# Altium PCB daughterboard.PcbDoc
Units mil, origin at the board's own origin, x right, y up, seen from the top; angles counter-clockwise.
Board outline 6000 x 4000 mil, 4 copper layers (Top Layer, Mid-Layer 1, Mid-Layer 2, Bottom Layer); 64 components, 93 nets, 397 pads, 0 vias.
Unrouted connection lines stored in the file: 194.
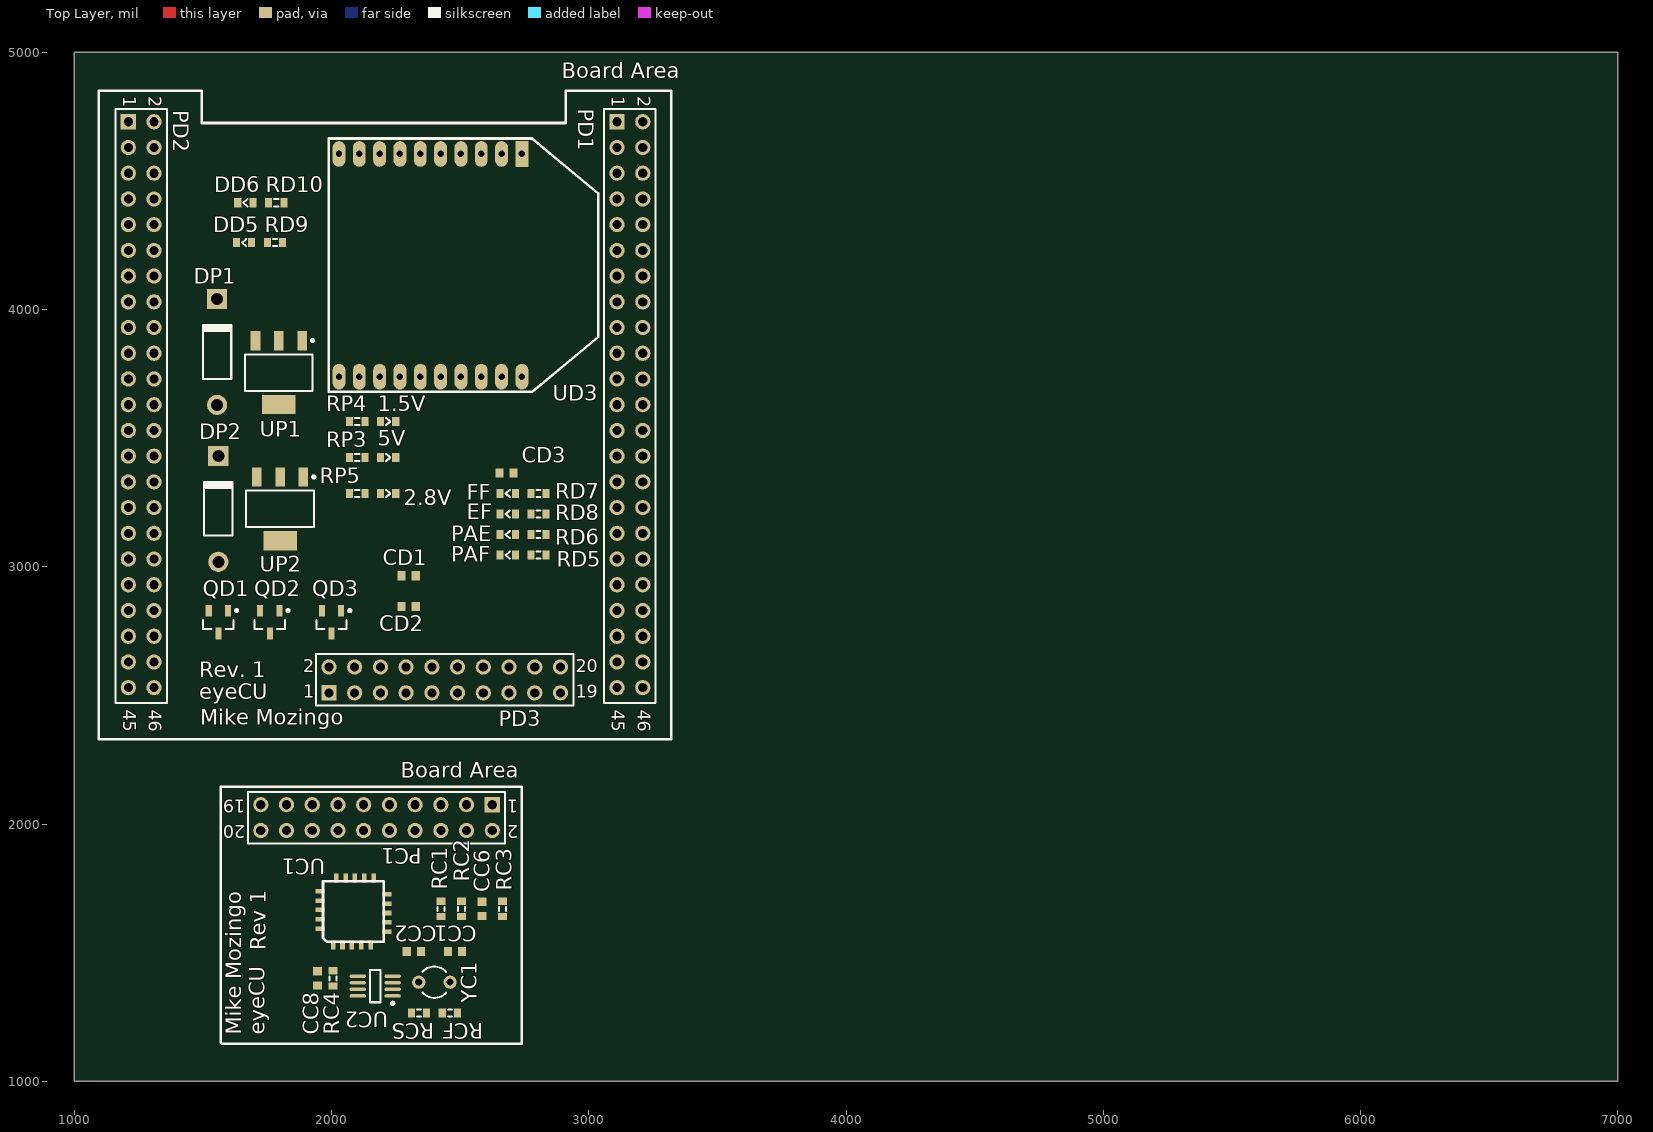
[diagram p0: Top Layer view]
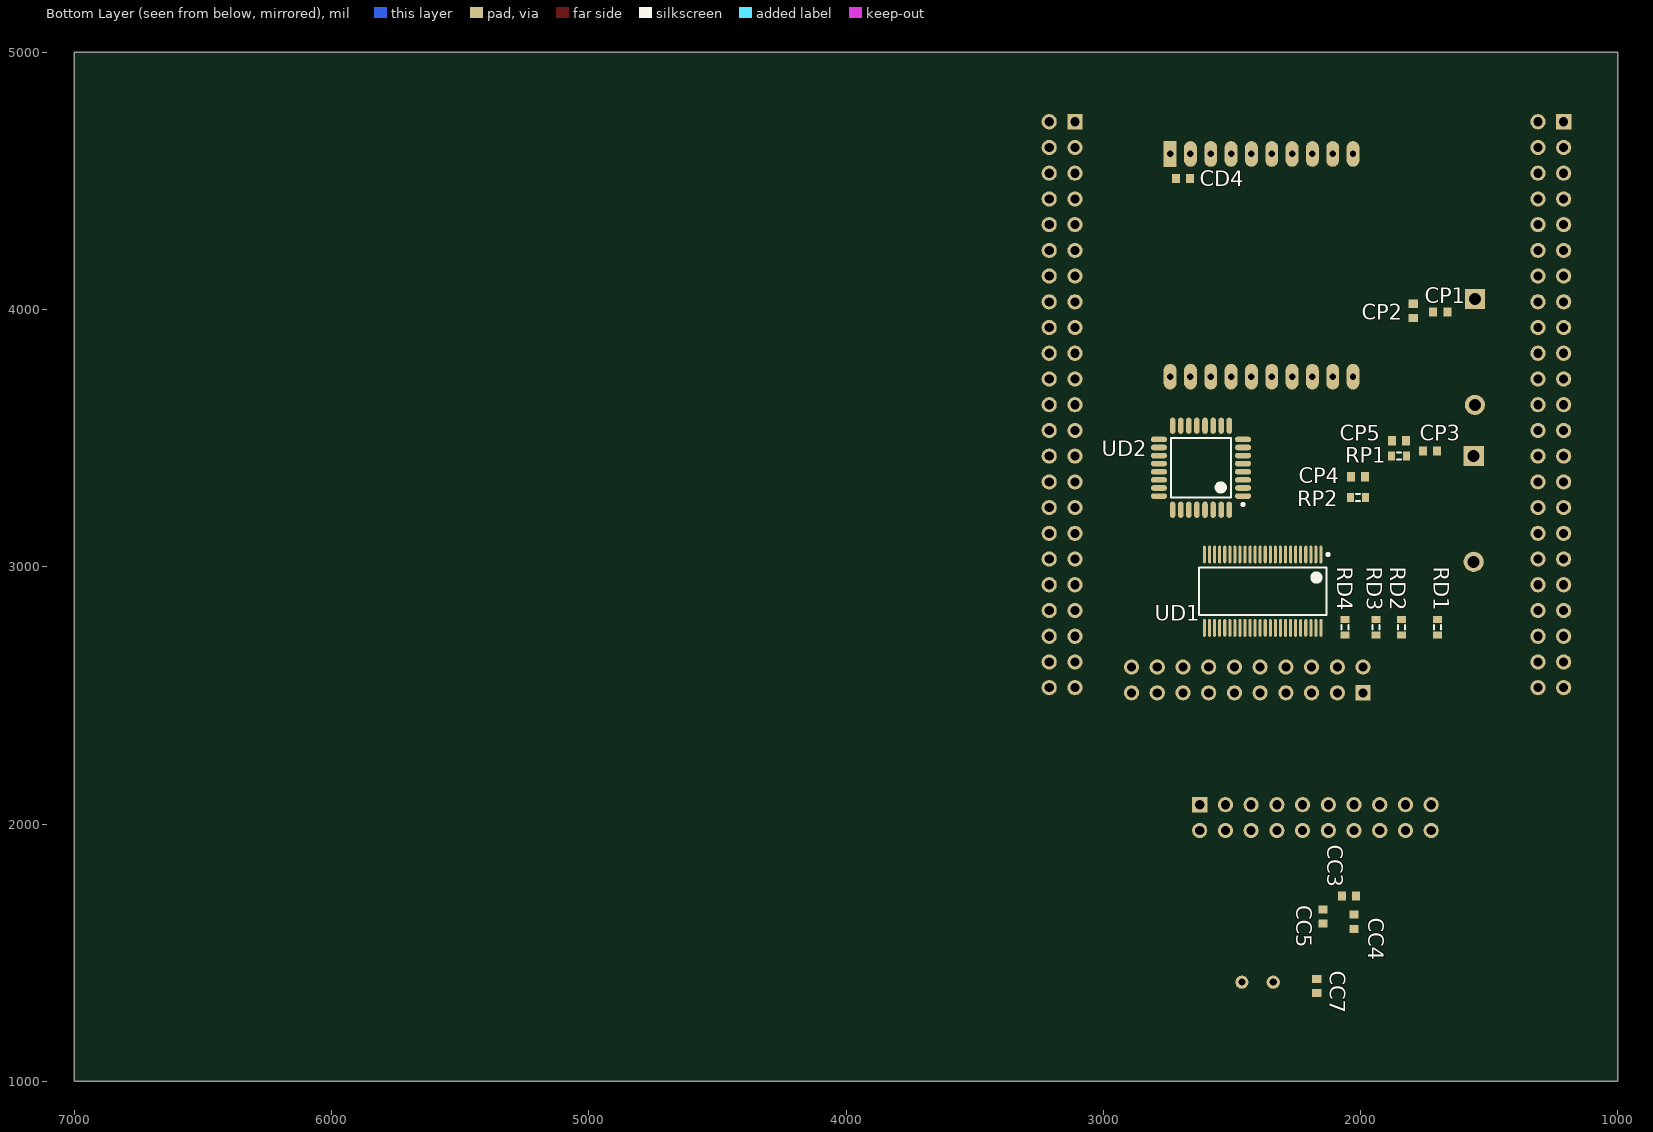
[diagram p1: Bottom Layer view, seen from below]
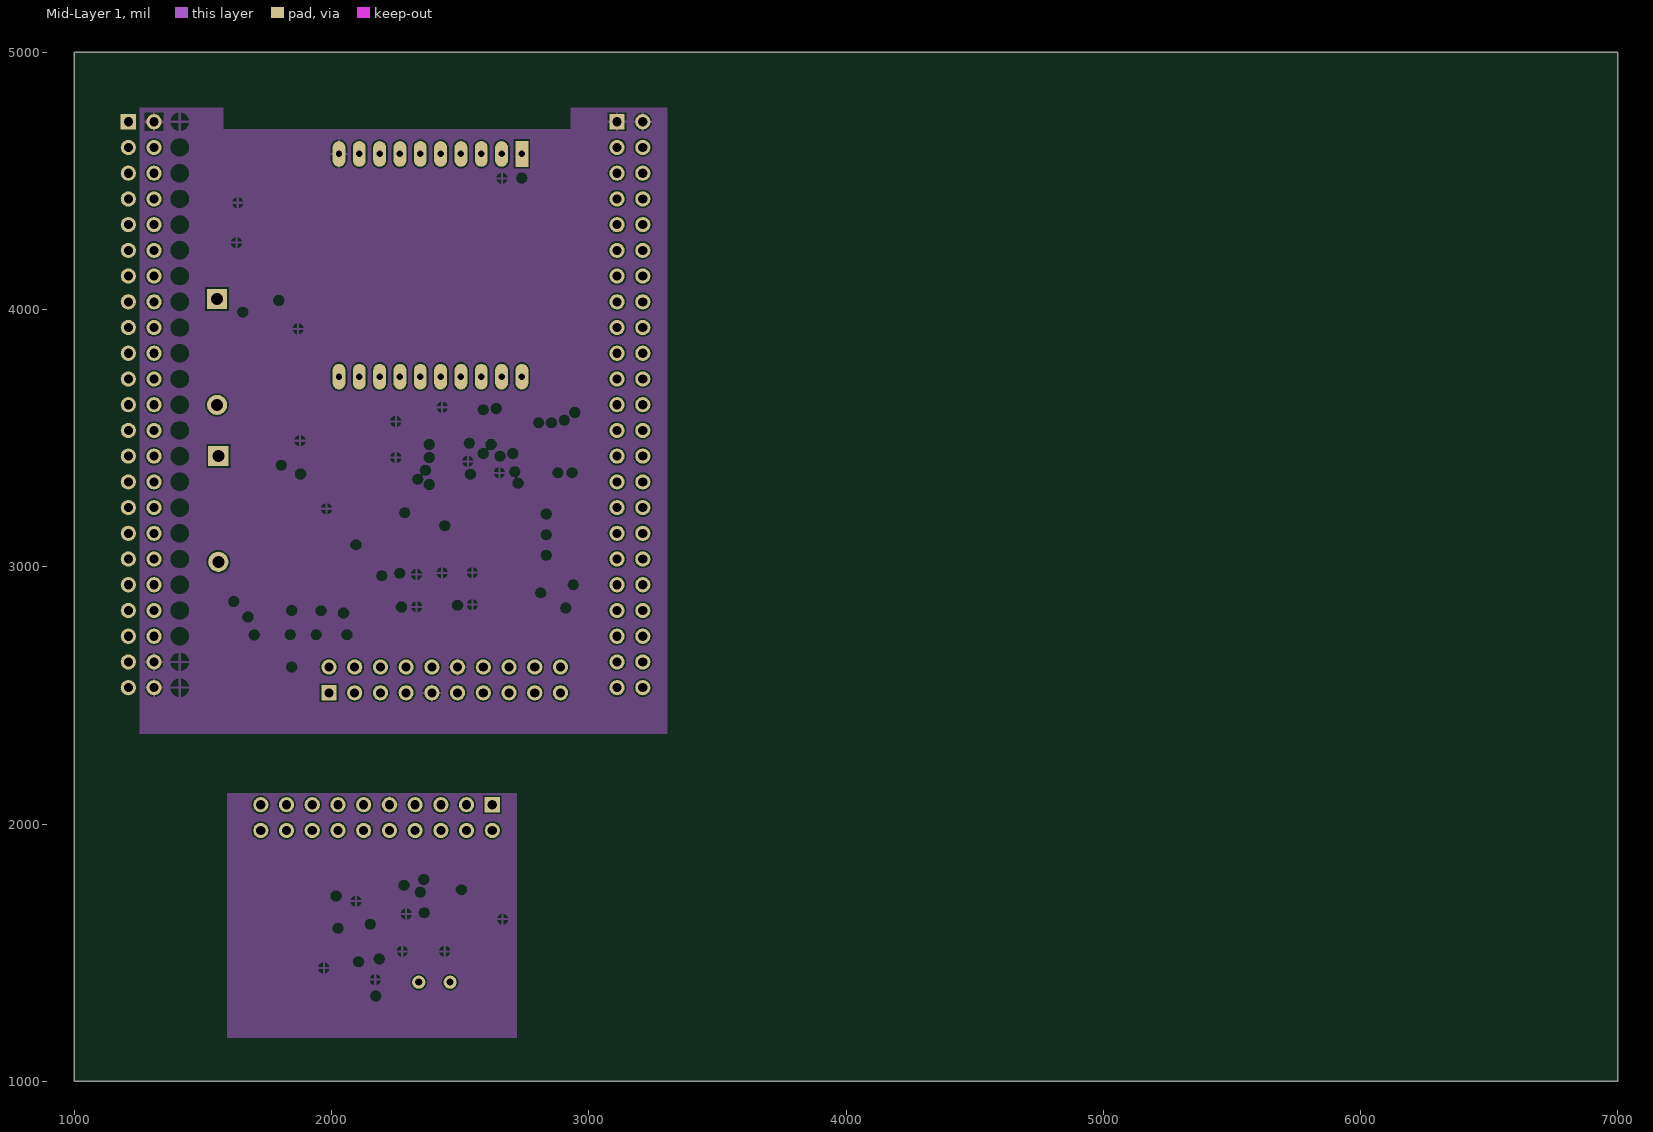
[diagram p2: Mid-Layer 1]
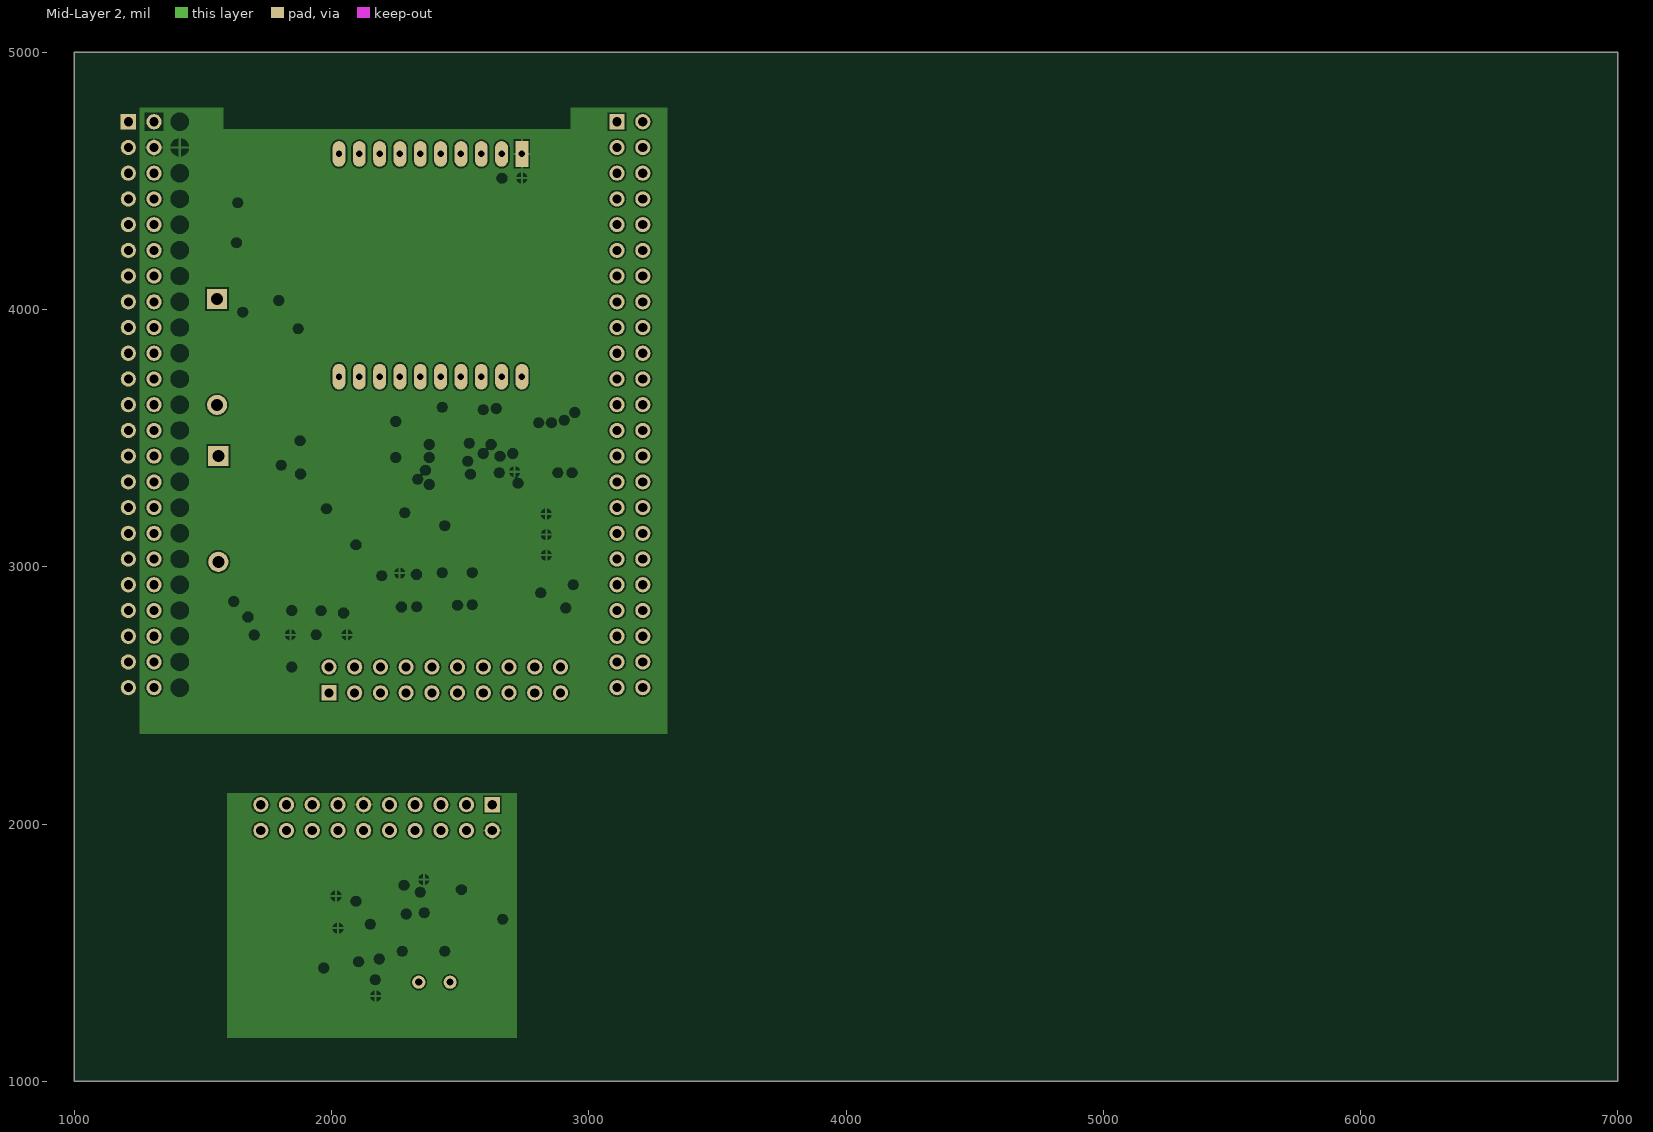
[diagram p3: Mid-Layer 2]

## Layer stack, top to bottom
Top Layer: signal copper 1.4
Dielectric: core 12.6, FR-4, Dk 4.8
Mid-Layer 1: signal copper 1.4
Dielectric: prepreg 12.6, FR-4, Dk 4.8
Mid-Layer 2: signal copper 1.4
Dielectric: core 12.6, FR-4, Dk 4.8
Bottom Layer: signal copper 1.4

## Board outline
1000,1000 7000,1000 7000,5000 1000,5000

## Design rules (kind name [scope] priority, off if disabled: settings)
Clearance [All] p1: gap=6
MinimumSolderMaskSliver [All] p1: minsoldermaskwidth=8
PolygonConnect [All] p1: connectstyle=Relief reliefconductorwidth=10 reliefentries=4 polygonreliefangle="90 Angle"
RoomDefinition camera [InComponentClass('camera')] p1: confinementstyle=ConfineIn formatcopy=TRUE lockcomponents=FALSE outline 2740,1145 2740,2150 1565,2150 1565,1145
RoutingVias [All] p1: holewidth=20 width=30 viastyle="Through Hole" minholewidth=20 minwidth=30 maxholewidth=20 maxwidth=30
SilkToSilkClearance [All] p1 off: silktosilkclearance=8
SilkscreenOverComponentPads [All] p1 off: minsilkscreentomaskgap=8
SolderMaskExpansion [All] p1: expansion=4
Width [All] p1: maxlimit=100 minlimit=10 preferedwidth=10 minimp=50.000000 maximp=50.000000 favimp=50.000000
25 further rules are at their usual default settings.

## Classes and differential pairs
component class CameraInterface: CD1 CD2 CD3 EF FF PAE PAF PD3 QD1 QD2 QD3 RD1 RD2 RD3 RD4 RD5 RD6 RD7 RD8 UD1 UD2
component class camera: CC1 CC2 CC3 CC4 CC5 CC6 CC7 CC8 PC1 RC1 RC2 RC3 RC4 RCF RCS UC1 UC2 YC1
component class connections_to_beaglebone: CD4 DD5 DD6 PD1 PD2 RD9 RD10 UD3
component class power: 1.5V 2.8V 5V CP1 CP2 CP3 CP4 CP5 DP1 DP2 RP1 RP2 RP3 RP4 RP5 UP1 UP2

## Components (designator, comment, footprint, x,y, rotation, side; value= is the part's Value field where it differs from the comment)
1.5V "LED2" DIODE1608 2220,3565 r0 top
2.8V "LED2" DIODE1608 2220,3285 r0 top
5V "LED2" DIODE1608 2220,3425 r0 top
CC1 "Cap Semi" CAPC1608L 2480,1505 r0 top
CC2 "Cap Semi" CAPC1608L 2320,1505 r0 top
CC3 "Cap Semi" CAPC1608L 2045,1720 r180 bottom
CC4 "Cap Semi" CAPC1608L 2025,1620 r270 bottom
CC5 "Cap Semi" CAPC1608L 2145,1640 r270 bottom
CC6 "Cap Semi" CAPC1608L 2585,1670 r270 top
CC7 "Cap Semi" CAPC1608L 2170,1370 r270 bottom
CC8 "Cap Semi" CAPC1608L 1945,1400 r270 top
CD1 "Cap Semi" CAPC1608L 2300,2965 r180 top
CD2 "Cap Semi" CAPC1608L 2300,2845 r180 top
CD3 "Cap Semi" CAPC1608L 2680,3365 r0 top
CD4 "Cap Semi" CAPC1608L 2690,4510 r0 bottom
CP1 "Cap Semi" CAPC1608L 1690,3990 r180 bottom
CP2 "Cap Semi" CAPC1608L 1795,3995 r90 bottom
CP3 "Cap Semi" CAPC1608L 1730,3450 r180 bottom
CP4 "Cap Semi" CAPC1608L 2010,3350 r0 bottom
CP5 "Cap Semi" CAPC1608L 1850,3490 r180 bottom
DD5 "LED2" DIODE1608 1660,4260 r180 top
DD6 "LED2" DIODE1608 1665,4415 r180 top
DP1 "Diode 1N4002" DIO10.46-5.3x2.8 1555,3835 r90 top
DP2 "Diode 1N4002" DIO10.46-5.3x2.8 1560,3225 r90 top
EF "LED2" DIODE1608 2685,3205 r180 top
FF "LED2" DIODE1608 2685,3285 r180 top
PAE "LED2" DIODE1608 2685,3125 r180 top
PAF "LED2" DIODE1608 2685,3045 r180 top
PC1 "Header 10X2" HDR2X10 2625,2075 r180 top
PD1 "Header 2x23" HDR2X23 3110,4730 r270 top
PD2 "Header 2x23" HDR2X23 1210,4730 r270 top
PD3 "Header 10X2" HDR2X10 1990,2510 r0 top
QD1 "MOSFET-N" SOT95P240-3N 1560,2785 r270 top
QD2 "MOSFET-N" SOT95P240-3N 1760,2785 r270 top
QD3 "MOSFET-N" SOT95P240-3N 2000,2785 r270 top
RC1 "Res3" RESC1608L 2425,1670 r90 top
RC2 "Res3" RESC1608L 2505,1670 r270 top
RC3 "Res3" RESC1608L 2665,1670 r90 top
RC4 "Res3" RESC1608L 2005,1400 r270 top
RCF "Res3" RESC1608L 2460,1265 r180 top
RCS "Res3" RESC1608L 2340,1265 r0 top
RD1 "Res3" RESC1608L 1700,2765 r270 bottom
RD2 "Res3" RESC1608L 1840,2765 r90 bottom
RD3 "Res3" RESC1608L 1940,2765 r270 bottom
RD4 "Res3" RESC1608L 2060,2765 r90 bottom
RD5 "Res3" RESC1608L 2805,3045 r0 top
RD6 "Res3" RESC1608L 2805,3125 r0 top
RD7 "Res3" RESC1608L 2805,3285 r0 top
RD8 "Res3" RESC1608L 2805,3205 r0 top
RD9 "Res3" RESC1608L 1780,4260 r180 top
RD10 "Res3" RESC1608L 1785,4415 r180 top
RP1 "Res3" RESC1608L 1850,3430 r180 bottom
RP2 "Res3" RESC1608L 2010,3270 r0 bottom
RP3 "Res3" RESC1608L 2100,3425 r0 top
RP4 "Res3" RESC1608L 2100,3565 r0 top
RP5 "Res3" RESC1608L 2100,3285 r0 top
UC1 "TCM8230MD_1" TCM8230MD 2085,1660 r180 top
UC2 "SN74LVC1404" SN74LVC1404 2170,1370 r180 top
UD1 "SN74LVCH16T245" SN74LVCH16T245 2380,2905 r270 bottom
UD2 "IDT72V241L10PF" IDT72V241L10PF 2620,3385 r0 bottom
UD3 "XBee" XBee 2740,4605 r270 top
UP1 "DCY Package (SOT-223)" TLV1117-DCY 1795,3755 r270 top
UP2 "DCY Package (SOT-223)" TLV1117-DCY 1800,3225 r270 top
YC1 "XTAL" BCY-W2/D3.1 2400,1385 r270 top

## Footprints (in the part's own frame and the unit in brackets; to place one, negate y for a bottom-side part, rotate by r counter-clockwise, add the part's x,y. Pads: shape width x height; smd on the part's side, far side on the other; paste and mask are expansions set on the pad)
BCY-W2/D3.1 [mm] "Crystal, Thru-Hole; 2 Leads; Body 3.1 x 8.2 mm (Dia.xH)"
  round 1.3 hole 0.7: 1(0,1.55) 2(0,-1.55)
  silkscreen extent -1.55,-1.19 1.55,1.17
CAPC1608L [mm] "Chip Capacitor, Body 1.6x0.8mm, IPC High Density"
  rect 0.8x0.9 smd: 1(-0.7,0) 2(0.7,0)
  body extent -0.87,-0.48 0.87,0.48, height 1.3
DIO10.46-5.3x2.8 [mm] "Diode, Axial; Body 5.2 x 2.7 mm (LxDia. max), Lead Dia. 0.86 mm (max)"
  round 2 hole 1.2: 1(-5.23,0)
  rect 2x2 hole 1.2: 2(5.23,0)
  silkscreen extent -2.65,-1.41 2.75,1.4
DIODE1608 [mm] "Chip Resistor, Body 1.6x0.8mm, IPC High Density"
  rect 0.7x0.9 smd: 1(-0.75,0) 2(0.75,0)
  silkscreen extent -0.2,-0.35 0.2,0.35, body extent -0.85,-0.48 0.85,0.48, height 0.9
HDR2X10 [mm] "Connector; Header; 10x2 Position"
  rect 1.5x1.5 hole 0.9: 1(0,0)
  round 1.5 hole 0.9: 2(0,2.54) 3(2.54,0) 4(2.54,2.54) 5(5.08,0) 6(5.08,2.54) 7(7.62,0) 8(7.62,2.54) 9(10.16,0) 10(10.16,2.54) 11(12.7,0) 12(12.7,2.54) 13(15.24,0) 14(15.24,2.54) 15(17.78,0) 16(17.78,2.54) 17(20.32,0) 18(20.32,2.54) 19(22.86,0) 20(22.86,2.54)
  silkscreen extent -1.27,-1.27 24.13,3.81
HDR2X23 [mm] "Connector; Header; 25x2 Position"
  rect 1.5x1.5 hole 0.9: 1(0,0)
  round 1.5 hole 0.9: 2(0,2.54) 3(2.54,0) 4(2.54,2.54) 5(5.08,0) 6(5.08,2.54) 7(7.62,0) 8(7.62,2.54) 9(10.16,0) 10(10.16,2.54) 11(12.7,0) 12(12.7,2.54) 13(15.24,0) 14(15.24,2.54) 15(17.78,0) 16(17.78,2.54) 17(20.32,0) 18(20.32,2.54) 19(22.86,0) 20(22.86,2.54) 21(25.4,0) 22(25.4,2.54) 23(27.94,0) 24(27.94,2.54) 25(30.48,0) 26(30.48,2.54) 27(33.02,0) 28(33.02,2.54) 29(35.56,0) 30(35.56,2.54) 31(38.1,0) 32(38.1,2.54) 33(40.64,0) 34(40.64,2.54) 35(43.18,0) 36(43.18,2.54) 37(45.72,0) 38(45.72,2.54) 39(48.26,0) 40(48.26,2.54) 41(50.8,0) 42(50.8,2.54) 43(53.34,0) 44(53.34,2.54) 45(55.88,0) 46(55.88,2.54)
  silkscreen extent -1.27,-1.27 57.4,3.81
IDT72V241L10PF [mm] "TQFP, 32-Leads, Body 9.0x9.0mm (max), Pitch 0.80mm, IPC Medium Density"
  oval 1.6x0.55 smd: 1(-4.15,2.8) 2(-4.15,2) 3(-4.15,1.2) 4(-4.15,0.4) 5(-4.15,-0.4) 6(-4.15,-1.2) 7(-4.15,-2) 8(-4.15,-2.8) 17(4.15,-2.8) 18(4.15,-2) 19(4.15,-1.2) 20(4.15,-0.4) 21(4.15,0.4) 22(4.15,1.2) 23(4.15,2) 24(4.15,2.8)
  oval 0.55x1.6 smd: 9(-2.8,-4.15) 10(-2,-4.15) 11(-1.2,-4.15) 12(-0.4,-4.15) 13(0.4,-4.15) 14(1.2,-4.15) 15(2,-4.15) 16(2.8,-4.15) 25(2.8,4.15) 26(2,4.15) 27(1.2,4.15) 28(0.4,4.15) 29(-0.4,4.15) 30(-1.2,4.15) 31(-2,4.15) 32(-2.8,4.15)
  silkscreen extent -4.27,-2.95 2.95,3.75, body extent -3.5,-3.5 3.5,3.5, height 1.6
RESC1608L [mm] "Chip Resistor, Body 1.6x0.8mm, IPC High Density"
  rect 0.7x0.9 smd: 1(-0.75,0) 2(0.75,0)
  silkscreen extent -0.2,-0.35 0.2,0.35, body extent -0.85,-0.48 0.85,0.48, height 0.9
SN74LVC1404 [mm] "TSOP, 8-Leads, Body 3.2x2.9mm (max), Pitch 0.65mm, IPC Medium Density"
  oval 1.6x0.35 smd: 1(-1.725,0.975) 2(-1.725,0.325) 3(-1.725,-0.325) 4(-1.725,-0.975) 5(1.725,-0.975) 6(1.725,-0.325) 7(1.725,0.325) 8(1.725,0.975)
  silkscreen extent -1.85,-1.6 0.53,1.82, body extent -1.45,-1.58 1.45,1.57, height 1.3
SN74LVCH16T245 [mm]
  oval 1.75x0.3 smd: 1(-3.625,5.75) 2(-3.625,5.25) 3(-3.625,4.75) 4(-3.625,4.25) 5(-3.625,3.75) 6(-3.625,3.25) 7(-3.625,2.75) 8(-3.625,2.25) 9(-3.625,1.75) 10(-3.625,1.25) 11(-3.625,0.75) 12(-3.625,0.25) 13(-3.625,-0.25) 14(-3.625,-0.75) 15(-3.625,-1.25) 16(-3.625,-1.75) 17(-3.625,-2.25) 18(-3.625,-2.75) 19(-3.625,-3.25) 20(-3.625,-3.75) 21(-3.625,-4.25) 22(-3.625,-4.75) 23(-3.625,-5.25) 24(-3.625,-5.75) 25(3.625,-5.75) 26(3.625,-5.25) 27(3.625,-4.75) 28(3.625,-4.25) 29(3.625,-3.75) 30(3.625,-3.25) 31(3.625,-2.75) 32(3.625,-2.25) 33(3.625,-1.75) 34(3.625,-1.25) 35(3.625,-0.75) 36(3.625,-0.25) 37(3.625,0.25) 38(3.625,0.75) 39(3.625,1.25) 40(3.625,1.75) 41(3.625,2.25) 42(3.625,2.75) 43(3.625,3.25) 44(3.625,3.75) 45(3.625,4.25) 46(3.625,4.75) 47(3.625,5.25) 48(3.625,5.75)
  silkscreen extent -3.75,-6.3 2.35,6.57, body extent -3.1,-6.3 3.1,6.3, height 1.2
SOT95P240-3N [mm] "SOT23, 3-Leads, Body 2.9x1.3mm, Pitch 0.95mm, Lead Span 2.4mm, IPC Medium Density"
  rect 1.15x0.6 smd: 1(-1.125,0.95) 2(-1.125,-0.95) 3(1.125,0)
  silkscreen extent -1.25,-1.5 0.7,1.93, body extent -0.7,-1.5 0.7,1.5, height 1.14
TCM8230MD [mm] "VGA CAMERA MODULE 640x480"
  rect 0.45x0.6 on Top Overlay: 0(-2.275,-1.4) 0(-1.625,-1.4) 0(-0.975,-1.4) 0(-0.325,1.4) 0(-0.325,-1.4) 0(0.325,1.4) 0(0.325,-1.4) 0(0.975,1.4) 0(1.625,1.4) 0(2.275,1.4)
  rect 0.6x0.45 on Top Overlay: 0(-1.4,2.275) 0(-1.4,0.975) 0(-1.4,1.625) 0(-1.4,-0.325) 0(-1.4,0.325) 0(1.4,-0.325) 0(1.4,0.325) 0(1.4,-1.625) 0(1.4,-0.975) 0(1.4,-2.275)
  rect 0.45x0.9 smd: 1(2,3.3) 2(1.075,3.3) 3(0.15,3.3) 4(-0.775,3.3) 5(-1.7,3.3) 11(-2,-3.3) 12(-1.075,-3.3) 13(-0.15,-3.3) 14(0.775,-3.3) 15(1.7,-3.3)
  rect 0.9x0.45 smd: 6(-3.3,2) 7(-3.3,1.075) 8(-3.3,0.15) 9(-3.3,-0.775) 10(-3.3,-1.7) 16(3.3,-2) 17(3.3,-1.075) 18(3.3,-0.15) 19(3.3,0.775) 20(3.3,1.7)
  silkscreen extent -3,-3 3,3
TLV1117-DCY [mm] "SOT223, 4-Leads, Body 6.7x7.3mm (max), Pitch 2.30mm, IPC Medium Density"
  rect 1.9x0.95 smd: 1(-3.15,2.3) 2(-3.15,0) 3(-3.15,-2.3)
  rect 1.9x3.3 smd: 4(3.15,0)
  silkscreen extent -3.27,-3.35 1.8,3.45, body extent -1.85,-3.35 1.85,3.35, height 1.8
XBee [mil]
  rect 100x50 hole 25: 1(0,0)
  oval 100x50 hole 25: 2(0,-79) 3(0,-158) 4(0,-237) 5(0,-316) 6(0,-395) 7(0,-474) 8(0,-553) 9(0,-632) 10(0,-711) 11(866,-711) 12(866,-632) 13(866,-553) 14(866,-474) 15(866,-395) 16(866,-316) 17(866,-237) 18(866,-158) 19(866,-79) 20(866,0)
  silkscreen extent -60,-750 925,297, body extent -65,-755 930,300, height 110

## Part data
1.5V 2.8V 5V DD5 DD6 EF FF PAE PAF: "Typical RED, GREEN, YELLOW, AMBER GaAs LED"
CC1 CC2 CC3 CC4 CC5 CC6 CC7 CC8 CD1 CD2 CD3 CD4 CP1 CP2 CP3 CP4 CP5: "Capacitor (Semiconductor SIM Model)"
DP1 DP2: "1 Amp General Purpose Rectifier"
PC1 PD3: "Header, 10-Pin, Dual row"
QD1 QD2 QD3: "N-Channel MOSFET"
RC1 RC2 RC3 RC4 RCF RCS RD1 RD2 RD3 RD4 RD5 RD6 RD7 RD8 RD9 RD10 RP1 RP2 RP3 RP4 RP5: "Resistor"
UC1: "VGA CAMERA MODULE 640x480"
UC2: "Oscillator driver."
UD1: "16-bit bus transceiver with voltage regulation."
UD2: "36K (4K x 9) FIFO Buffer"
UD3: "XBee wireless transmitter/reveiver"
UP1 UP2: library part TLV1117
YC1: "Crystal Oscillator"

## Nets (pads, with @x,y where several pads share a name; then routed paths per layer and width w, separated by ;. In a path a pad name is that pad's centre, name@x,y a point inside that pad or via, vN(x,y) a via of type N, cw(c..) or ccw(c..) an arc to the next point about the centre after c; other vN are vias at no path point)
1DIR: PD1.20 UD1.1
2DIR: PD1.18 UD1.24
\REN1: PD1.17 UD2.6
\REN2: PD1.16 UD2.8
\RS: PD1.12 UD2.25
\WEN1: PD1.15 UD2.24
C1_CLK: CC8.2 RC4.2 UC1.2 UC2.6 UC2.7
C1_DCLK: PC1.18 UC1.10
C1_DOUT0: PC1.1 UC1.11
C1_DOUT1: PC1.3 UC1.12
C1_DOUT2: PC1.5 UC1.13
C1_DOUT3: PC1.7 UC1.14
C1_DOUT4: PC1.13 UC1.17
C1_DOUT5: PC1.15 UC1.18
C1_DOUT6: PC1.17 UC1.19
C1_DOUT7: PC1.19 UC1.20
C1_DVDD: CC5.2 PC1.10 UC1.6
C1_DVSS: CC1.1 CC2.1 CC3.1 CC4.1 CC5.1 CC7.1 CC8.1 PC1.9 RC3.1 RC4.1 UC1.7 UC1.15 UC2.4
C1_HD: PC1.16 UC1.9
C1_IOVDD: CC3.2 CC4.2 CC7.2 PC1.2 PC1.11 RC1.2 UC1.1 UC1.16 UC2.1 UC2.8
C1_RST1: PC1.4 RC2.1
C1_SCL: PC1.6 UC1.4
C1_SDA: PC1.8 UC1.5
C1_VD: PC1.14 UC1.8
C1_VDSS: PC1.12
C_DATA0: PD1.25 UD2.12
C_DATA1: PD1.24 UD2.13
C_DATA2: PD1.5 UD2.14
C_DATA3: PD1.6 UD2.15
C_DATA4: PD1.23 UD2.16
C_DATA5: PD1.22 UD2.17
C_DATA6: PD1.3 UD2.18
C_DATA7: PD1.4 UD2.19
C_DCLK: PD3.18 UD1.47
C_DOUT0: PD3.1 UD1.36
C_DOUT1: PD3.3 UD1.35
C_DOUT2: PD3.5 UD1.33
C_DOUT3: PD3.7 UD1.32
C_DOUT4: PD3.13 UD1.30
C_DOUT5: PD3.15 UD1.29
C_DOUT6: PD3.17 UD1.27
C_DOUT7: PD3.19 UD1.26
C_DVDD: CP2.2 DP1.1 PD3.10 RP4.1 UP1.2 UP1.4
C_HD: PD3.16 UD1.46
C_HORIZONTALSYNC: PD2.15 UD1.3
C_IOVDD: CD2.2 CP5.2 DP2.1 PD3.2 PD3.11 QD1.2 QD2.2 QD3.2 RD1.1 RD3.1 RP1.2 RP5.1 UD1.31 UD1.42 UP2.2 UP2.4
C_IOVSS: 1.5V.2 2.8V.2 5V.2 CD1.1 CD2.1 CD3.1 CD4.1 CP4.1 CP5.1 DD5.2 DD6.2 PD1.1 PD1.2 PD2.1 PD2.2 PD2.43 PD2.44 PD2.45 PD2.46 PD3.9 PD3.12 RP2.1 UD1.4 UD1.10 UD1.15 UD1.21 UD1.28 UD1.34 UD1.39 UD1.45 UD2.5 UD2.9 UD2.26 UD3.10 UP1.1
C_RST: PD3.4 QD1.3
C_SCL: PD3.6 QD2.3 RD1.2
C_SDA: PD3.8 QD3.3 RD3.2
C_SDCLK: UD1.2 UD2.23
C_VD: PD3.14 UD1.44
C_VERTICALSYNC: PD1.41 UD1.5
CAM_RST: PD1.11 QD1.1
E\F\: EF.2 PD2.42 UD2.10
F\F\: FF.2 PD1.43 UD2.11
LED_BLINK: PD1.8 RD10.1
Net1.5V_1: 1.5V.1 RP4.2
Net2.8V_1: 2.8V.1 RP5.2
Net5V_1: 5V.1 RP3.2
NetCC1_2: CC1.2 RCF.1 YC1.1
NetCC2_2: CC2.2 RCS.1 UC2.3 YC1.2
NetCC6_1: CC6.1 RC3.2
NetCC6_2: CC6.2 RC1.1 RC2.2 UC1.3
NetCP1_1: CP1.1 CP2.1
NetCP3_1: CP3.1 CP4.2 RP1.1 RP2.2 UP2.1
NetDD5_1: DD5.1 RD9.2
NetDD6_1: DD6.1 RD10.2
NetEF_1: EF.1 RD8.1
NetFF_1: FF.1 RD7.1
NetPAE_1: PAE.1 RD6.1
NetPAF_1: PAF.1 RD5.1
NetRCF_2: RCF.2 RCS.2 UC2.2
NetRD9_1: RD9.1 UD3.13
NetUD1_13: UD1.13 UD2.2
NetUD1_14: UD1.14 UD2.1
NetUD1_16: UD1.16 UD2.32
NetUD1_17: UD1.17 UD2.31
NetUD1_19: UD1.19 UD2.30
NetUD1_20: UD1.20 UD2.29
NetUD1_22: UD1.22 UD2.28
NetUD1_23: UD1.23 UD2.27
P\A\E\: PAE.2 PD1.21 UD2.4
P\A\F\: PAF.2 PD1.26 UD2.3
RCLK: PD1.45 UD2.7
RX: PD2.26 UD3.2
SCL: PD2.17 QD2.1 RD2.2
SDA: PD2.18 QD3.1 RD4.2
SYS_5V: PD2.7 PD2.8
TX: PD2.24 UD3.3
VDD_3V3EXP: CD1.2 CD3.2 CD4.2 PD2.3 PD2.4 RD2.1 RD4.1 RD5.2 RD6.2 RD7.2 RD8.2 UD1.7 UD1.18 UD2.21 UD3.1
VDD_5V: CP1.2 CP3.2 DP1.2 DP2.2 PD2.5 PD2.6 RP3.1 UP1.3 UP2.3
WEN2: PD1.14 UD2.22
pads on no net: PC1.20 PD1.7 PD1.9 PD1.10 PD1.13 PD1.19 PD1.27 PD1.28 PD1.29 PD1.30 PD1.31 PD1.32 PD1.33 PD1.34 PD1.35 PD1.36 PD1.37 PD1.38 PD1.39 PD1.40 PD1.42 PD1.44 PD1.46 PD2.9 PD2.10 PD2.11 PD2.12 PD2.13 PD2.14 PD2.16 PD2.19 PD2.20 PD2.21 PD2.22 PD2.23 PD2.25 PD2.27 PD2.28 PD2.29 PD2.30 PD2.31 PD2.32 PD2.33 PD2.34 PD2.35 PD2.36 PD2.37 PD2.38 PD2.39 PD2.40 PD2.41 PD3.20 UC1.0 UC2.5 UD1.6 UD1.8 UD1.9 UD1.11 UD1.12 UD1.25 UD1.37 UD1.38 UD1.40 UD1.41 UD1.43 UD1.48 UD2.20 UD3.4 UD3.5 UD3.6 UD3.7 UD3.8 UD3.9 UD3.11 UD3.12 UD3.14 UD3.15 UD3.16 UD3.17 UD3.18 UD3.19 UD3.20

## Polygon pours and split planes (outlines as drawn)
C_IOVSS on Mid-Layer 1 "Cam Ground" (solid, pour order 1000): 1255,4785 1580,4785 1580,4700 2930,4700 2930,4785 3265,4785 3305,4785 3305,2350 1255,2350 1255,4785
C1_DVSS on Mid-Layer 1 "Cam Ground" (solid, pour order 1001): 1595,1170 1595,2120 2720,2120 2720,1170 1595,1170
C1_IOVDD on Mid-Layer 2 "Cam Ground" (solid, pour order 1002): 1595,1170 1595,2120 2720,2120 2720,1170 1595,1170
VDD_3V3EXP on Mid-Layer 2 "Cam Ground" (solid, pour order 1003): 1255,4785 1580,4785 1580,4700 2930,4700 2930,4785 3305,4785 3305,2350 1255,2350 1255,4785

## Silkscreen, mask and mechanical layers (free items; w line width, h text height)
Top Overlay:
  lines w10: 1570,1150 1570,2145 2740,2145 2740,1145 1575,1145 ; 1095,2330 1095,2390 1095,4850 1480,4850 1495,4850 1495,4725 2910,4725 2910,4850 3320,4850 3320,4818.75 3320,4786.25 3320,4770 3320,2330 1175,2330 1095,2330
  text "Board Area" at 2895,4900 h60
  text "Rev. 1" at 1485,2570 h60
  text "eyeCU" at 1485,2485 h60
  text "Mike Mozingo" at 1490,2385 h60
  text "Board Area" at 2270,2180 h60
  text "Rev 1" at 1745,1510 h60 r90
  text "Mike Mozingo" at 1650,1180 h60 r90
  text "eyeCU" at 1740,1180 h60 r90

## Text inside footprints (layer, text, board x,y; h text height)
PC1: Top Overlay "2" at 2725,1995 h50 r180; Top Overlay "1" at 2725,2095 h50 r180; Top Overlay "19" at 1665,2095 h50 r180; Top Overlay "20" at 1665,1995 h50 r180
PD1: Top Overlay "2" at 3190,4830 h50 r270; Top Overlay "1" at 3090,4830 h50 r270; Top Overlay "45" at 3090,2445 h50 r270; Top Overlay "46" at 3190,2445 h50 r270
PD2: Top Overlay "2" at 1290,4830 h50 r270; Top Overlay "1" at 1190,4830 h50 r270; Top Overlay "45" at 1190,2445 h50 r270; Top Overlay "46" at 1290,2445 h50 r270
PD3: Top Overlay "2" at 1890,2590 h50; Top Overlay "1" at 1890,2490 h50; Top Overlay "19" at 2950,2490 h50; Top Overlay "20" at 2950,2590 h50